# Altium PCB Voron_Chassis_Circuit_PCB.PcbDoc
Units mil, origin at the board's own origin, x right, y up, seen from the top; angles counter-clockwise.
Board outline 2559.06 x 2204.72 mil, 2 copper layers (Top Layer, Bottom Layer); 8 components, 14 nets, 36 pads, 0 vias.
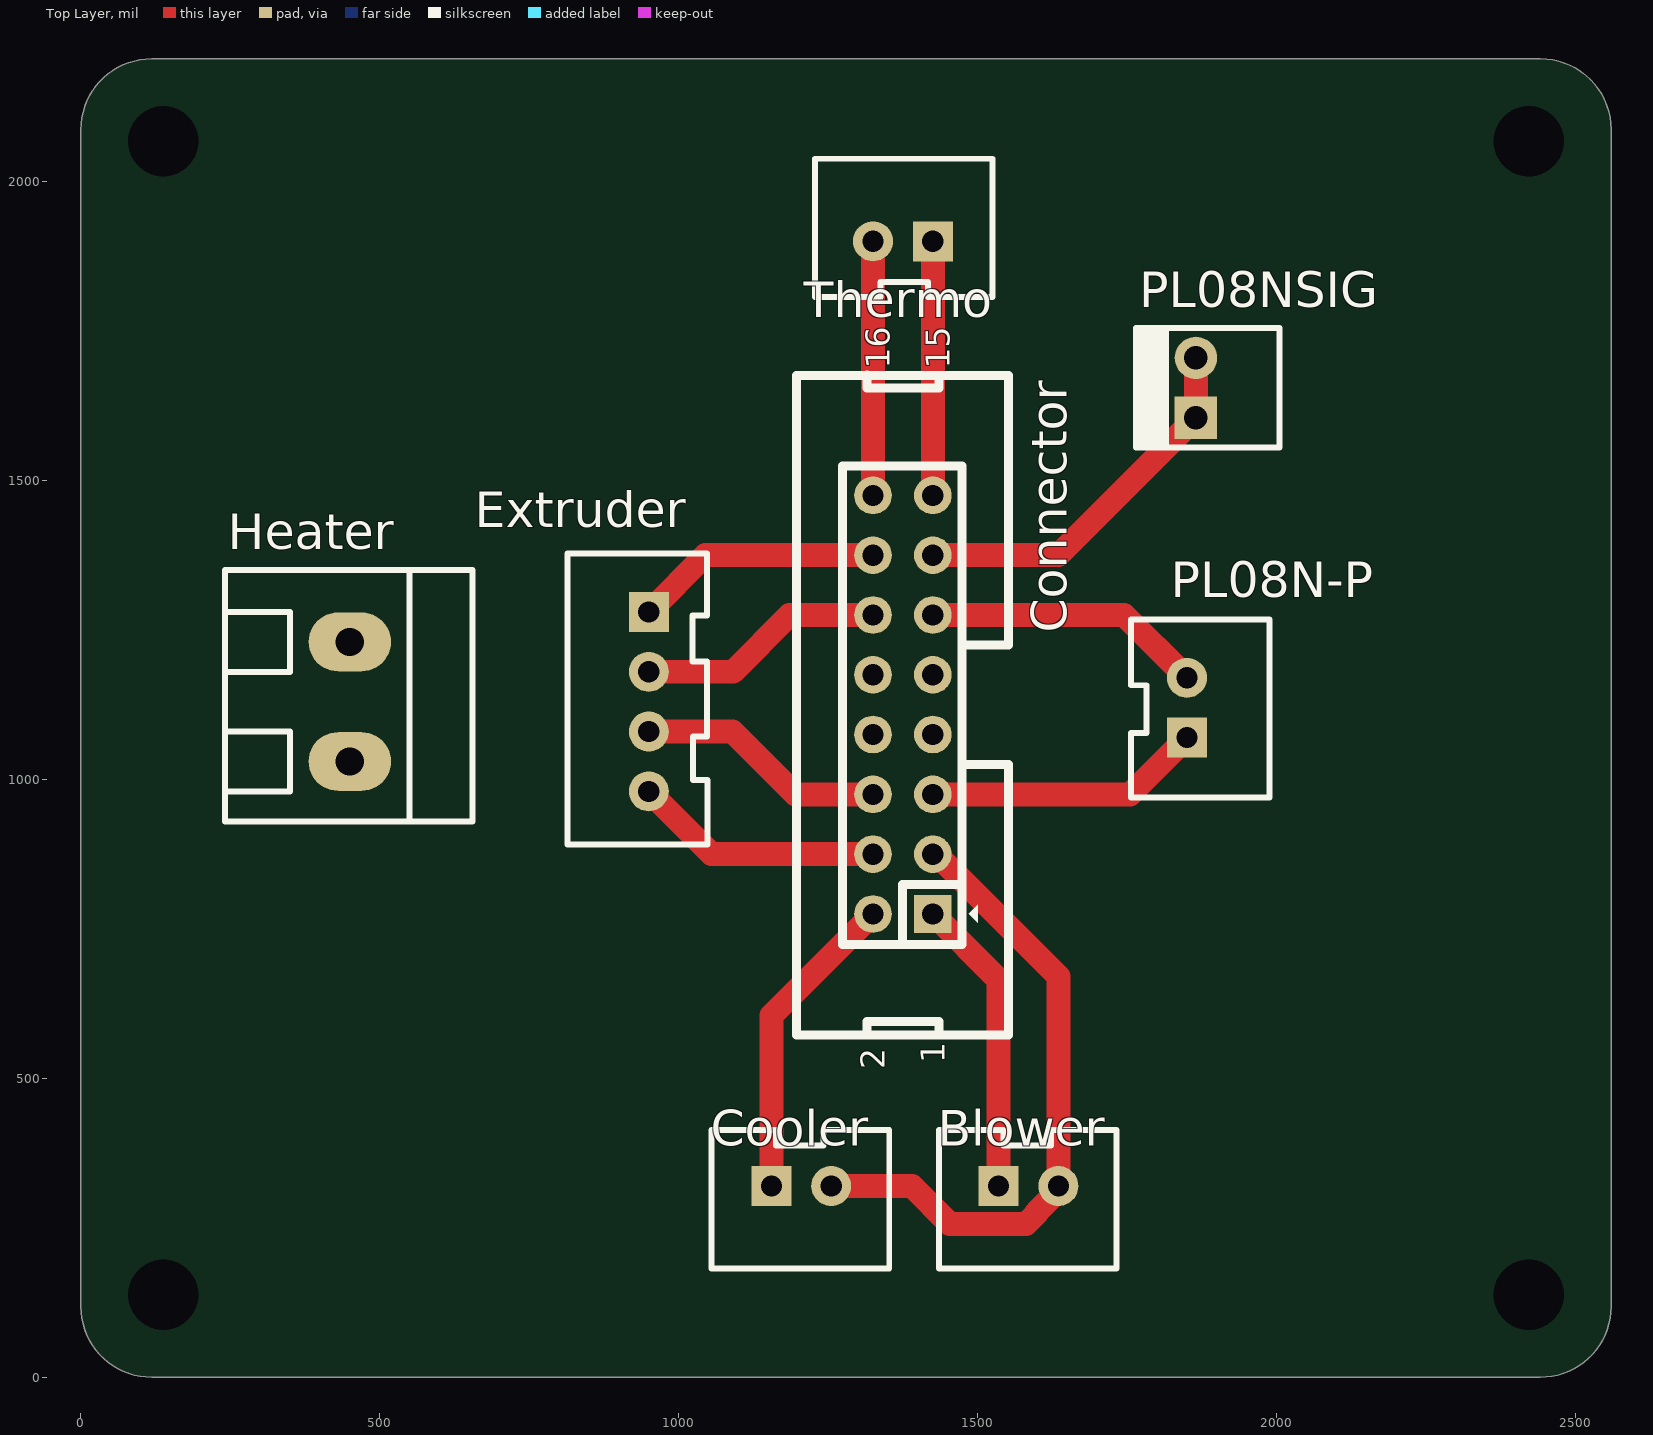
[diagram p0: Top Layer view]
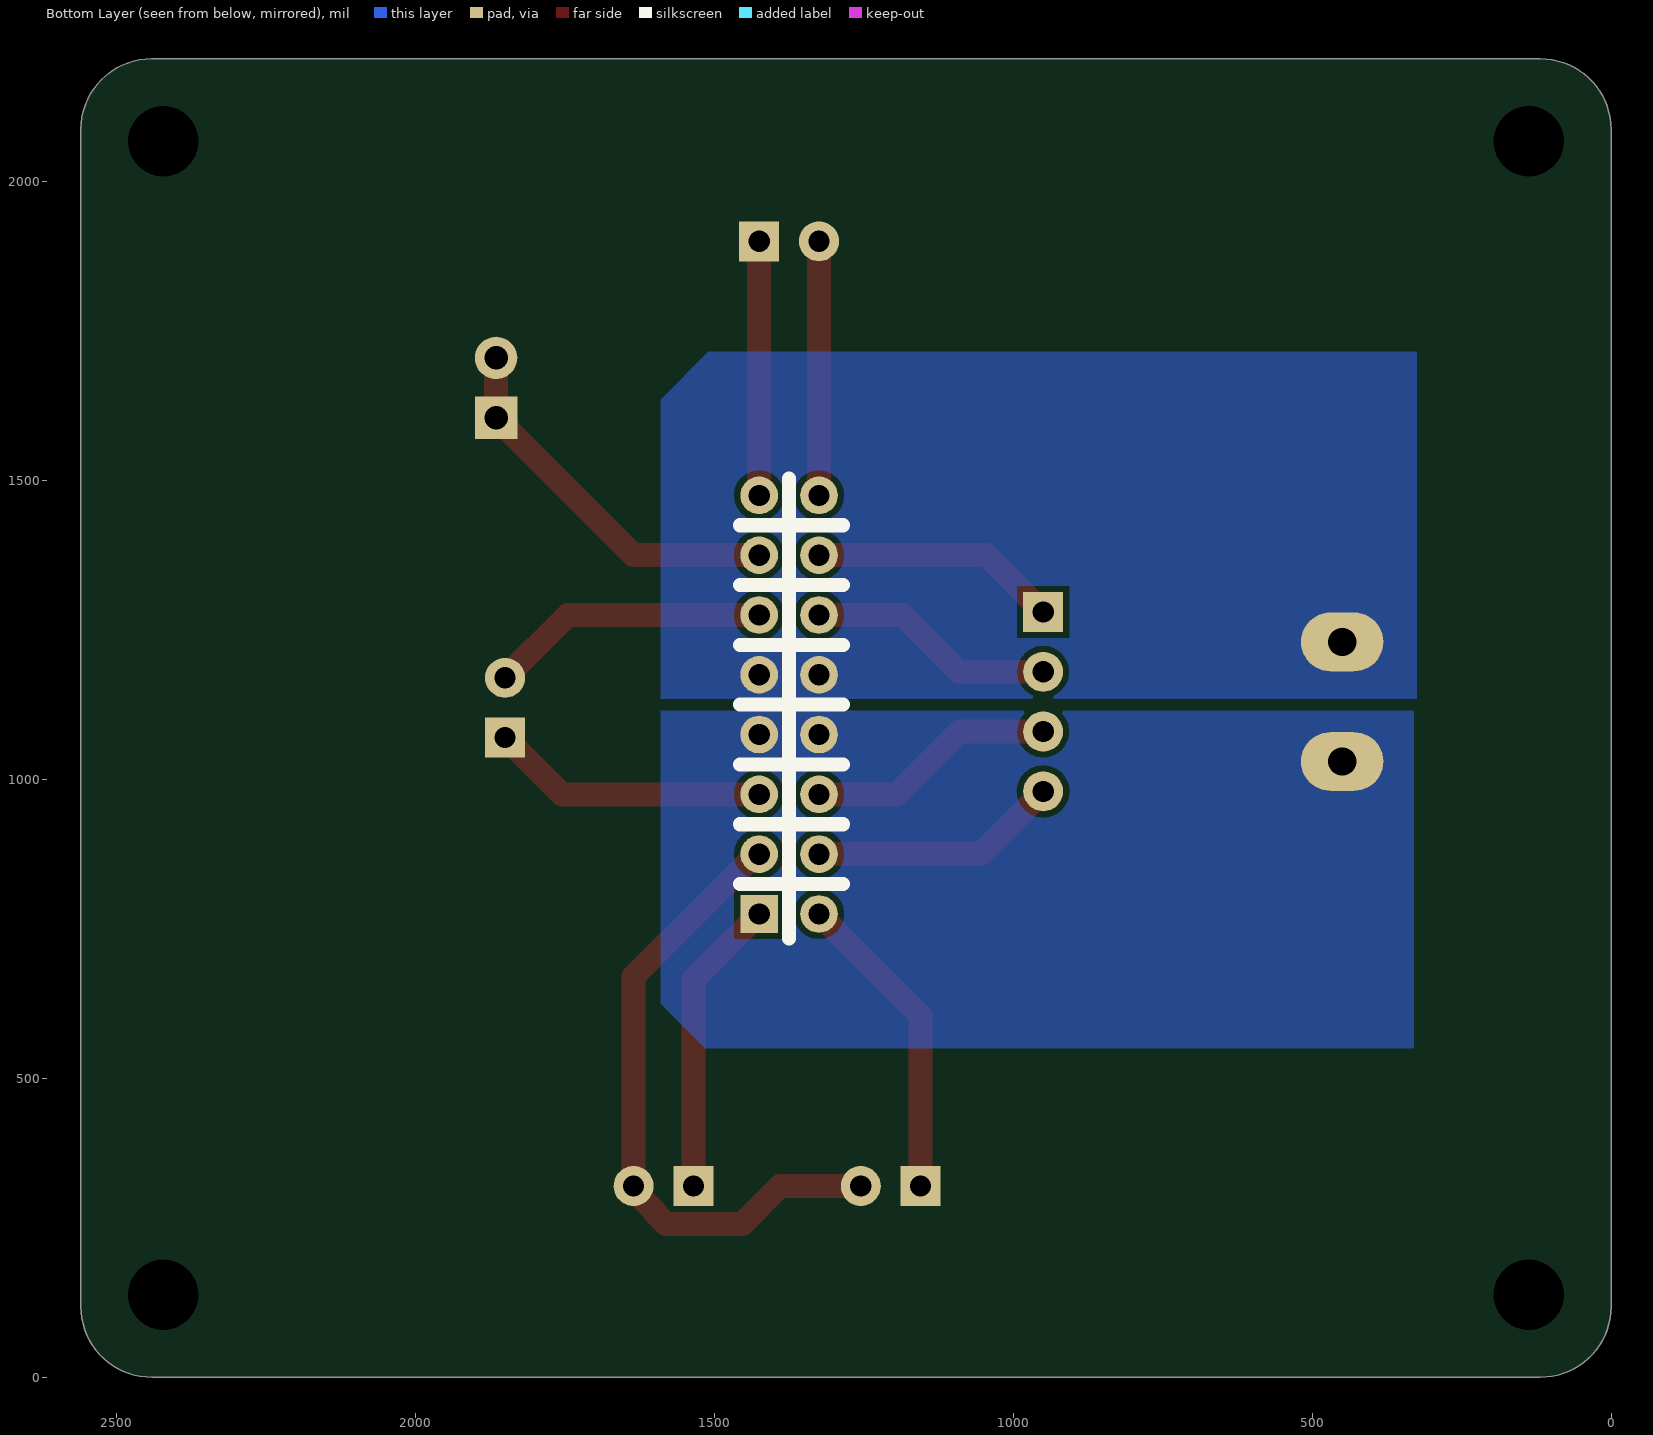
[diagram p1: Bottom Layer view, seen from below]

## Layer stack, top to bottom
Top Solder: solder mask 0.4, Solder Resist, Dk 3.5
Top Layer: signal copper 1.4
Dielectric 1: dielectric 12.6, FR-4, Dk 4.8
Bottom Layer: signal copper 1.4
Bottom Solder: solder mask 0.4, Solder Resist, Dk 3.5

## Board outline
0.25,118.36 ccw(c118.36,118.36) 118.36,0.25 2441.19,0.25 ccw(c2441.19,118.36) 2559.31,118.36 2559.31,2086.86 ccw(c2441.19,2086.86) 2441.19,2204.97 118.36,2204.97 ccw(c118.36,2086.86) 0.25,2086.86

## Design rules (kind name [scope] priority, off if disabled: settings)
Clearance [All] p1: gap=10 ignorepadtopadclearanceinfootprint=FALSE except(0: Arc-Hole Track-Hole SMDPad-Hole THPad-Hole Via-Hole Fill-Hole Poly-Hole Region-Hole Text-Hole)
PolygonConnect [All] p1: connectstyle=Direct reliefconductorwidth=10 reliefentries=4 polygonreliefangle="90 Angle" airgapwidth=10
RoomDefinition Schematic [InComponentClass('Schematic')] p1: confinementstyle=ConfineIn formatcopy=TRUE lockcomponents=FALSE outline 0,0 2610,0 2610,2245 0,2245
RoutingVias [All] p1: holewidth=28 width=50 viastyle="Through Hole" minholewidth=28 minwidth=50 maxholewidth=28 maxwidth=50
SolderMaskExpansion [All] p1: expansion=4 istentingtop=FALSE
Width [All] p1: maxlimit=40 minlimit=10 preferedwidth=20 minimp=50.000000 maximp=50.000000 favimp=50.000000
30 further rules are at their usual default settings.

## Components (designator, comment, footprint, x,y, rotation, side; value= is the part's Value field where it differs from the comment)
Blower "HDR-1X2" XH2.54-LI-2P 1585,320 r0 top
Connector "Header 8X2" IDC2.54-LI-2x8P 1425,775 r90 top
Cooler "HDR-1X2" XH2.54-LI-2P 1205,320 r0 top
Extruder "HDR-1X4" XH2.54-LI-4P 950,1130 r270 top
Heater "HDR-1X2" KF128-5.08-2P 450,1130 r270 top
PL08N-P "HDR-1X2" XH2.54-LI-2P 1850,1120 r90 top
PL08NSIG "HDR-1X2" KF2510-LI-2P 1865,1655 r90 top
Thermo "HDR-1X2" XH2.54-LI-2P 1375,1900 r180 top

## Footprints (in the part's own frame and the unit in brackets; to place one, negate y for a bottom-side part, rotate by r counter-clockwise, add the part's x,y. Pads: shape width x height; smd on the part's side, far side on the other; paste and mask are expansions set on the pad)
IDC2.54-LI-2x8P [mm] "16P简易牛角座 淘宝ID:黄晶宝石   店铺网址:https://shop463601444.taobao.com"
  rect 1.6x1.6 hole 0.9: 1(0,0)
  round 1.6 hole 0.9: 2(0,2.54) 3(2.54,0) 4(2.54,2.54) 5(5.08,0) 6(5.08,2.54) 7(7.62,0) 8(7.62,2.54) 9(10.16,0) 10(10.16,2.54) 11(12.7,0) 12(12.7,2.54) 13(15.24,0) 14(15.24,2.54) 15(17.78,0) 16(17.78,2.54)
  silkscreen extent -5.14,-3.2 22.89,5.8, body extent -5.08,-3.08 22.86,5.77, height 9.17
KF128-5.08-2P [mm] "螺钉式接线端子，脚距5.08mm"
  oval 2.5x3.5 hole 1.2: 1(-2.54,0) 2(2.54,0)
  silkscreen extent -5.59,-5.31 5.08,5.21, body extent -5.58,-5.3 5.08,5.2, height 14.15
KF2510-LI-2P [mm] "接插件/2A"
  rect 1.8x1.8 hole 1: 1(-1.27,0)
  round 1.8 hole 1: 2(1.27,0)
  silkscreen extent -2.59,-3.56 2.54,2.54, body extent -2.54,-3.5 2.54,2.4, height 11.05
XH2.54-LI-2P [mm] "接插件，2P  淘宝ID:黄晶宝石   店铺网址:https://shop463601444.taobao.com"
  rect 1.7x1.7 hole 0.9: 1(-1.27,0)
  round 1.7 hole 0.9: 2(1.27,0)
  silkscreen extent -3.81,-3.51 3.74,2.37, body extent -3.77,-3.3 3.77,2.4, height 7.05
XH2.54-LI-4P [mm] "接插件，4P  淘宝ID:黄晶宝石   店铺网址:https://shop463601444.taobao.com"
  rect 1.7x1.7 hole 0.9: 1(-3.81,0)
  round 1.7 hole 0.9: 2(-1.27,0) 3(1.27,0) 4(3.81,0)
  silkscreen extent -6.3,-3.45 6.07,2.49, body extent -6.31,-3.3 6.31,2.4, height 7.03

## Part data
Blower Cooler Heater PL08N-P PL08NSIG Thermo: library part "Header 2", "2P接插件", BOM名称=2P接插件
  Blower Cooler PL08N-P PL08NSIG Thermo: 版权归属="封装库来自淘宝 ID：黄晶宝石", 联系售后=https://shop463601444.taobao.com
  Heater: 学习资源=https://shop463601444.taobao.com, 版权归属="封装库来自淘宝卖家 ID：黄晶宝石"
Connector: "8*2P接插件", BOM名称=8*2P接插件, 学习资源=https://shop463601444.taobao.com, 版权归属="封装库来自淘宝 ID：黄晶宝石"
Extruder: library part "Header 4", "4P接插件", BOM名称=4P接插件, 学习资源=https://shop463601444.taobao.com, 版权归属="封装库来自淘宝 ID：黄晶宝石"

## Free pads (board coordinates)
  round 106.3 hole 118.11: ""(138.05,138.05) ""(138.05,2067.18) ""(2421.51,138.05) ""(2421.51,2067.18)

## Nets (pads, with @x,y where several pads share a name; then routed paths per layer and width w, separated by ;. In a path a pad name is that pad's centre, name@x,y a point inside that pad or via, vN(x,y) a via of type N, cw(c..) or ccw(c..) an arc to the next point about the centre after c; other vN are vias at no path point)
BlowerHIGH: Blower.1 Connector.1 | length 500.6
  Top Layer w40: Connector.1 1535,665 Blower.1
CoolerHIGH: Connector.2 Cooler.1 | length 525.4
  Top Layer w40: Cooler.1 1155,605 Connector.2
FanGND: Blower.2 Connector.3 Cooler.2 | length 1083.2
  Top Layer w40: Cooler.2 1389.86,320 1453.32,256.54 1580.89,256.54 1598.46,274.11 1598.46,276.18 1635,312.71 Blower.2 1635,670.42 1430.42,875 Connector.3
HeaterH: Connector.9 Connector.10 Heater.1
HeaterL: Connector.7 Connector.8 Heater.2
Motor1: Connector.14 Extruder.1 | length 414.4
  Top Layer w40: Extruder.1 1045,1375 Connector.14
Motor2: Connector.12 Extruder.2 | length 414.4
  Top Layer w40: Extruder.2 1090.53,1180 1185.53,1275 Connector.12
Motor3: Connector.6 Extruder.3 | length 418.5
  Top Layer w40: Extruder.3 1090,1080 1195,975 Connector.6
Motor4: Connector.4 Extruder.4 | length 418.5
  Top Layer w40: Extruder.4 1055,875 Connector.4
PL08NG: Connector.11 PL08N-P.2 | length 468.5
  Top Layer w40: Connector.11 1745,1275 PL08N-P.2
PL08NH: Connector.5 PL08N-P.1 | length 464.4
  Top Layer w40: Connector.5 1755,975 PL08N-P.1
PL08NSIG_OUT: Connector.13 PL08NSIG.1 PL08NSIG.2 | length 635.3
  Top Layer w40: Connector.13 1635,1375 PL08NSIG.1 PL08NSIG.2
THERMOH: Connector.15 Thermo.1 | length 425
  Top Layer w40: Connector.15 Thermo.1
THERMOL: Connector.16 Thermo.2 | length 425
  Top Layer w40: Connector.16 Thermo.2

## Polygon pours and split planes (outlines as drawn)
HeaterL on Bottom Layer "HeaterH" (solid, pour order 1): 1590,1115 330,1115 330,550 1515,550 1590,625
HeaterH on Bottom Layer "HeaterH" (solid, pour order 0): 1590,1135 325,1135 325,1715 1510,1715 1590,1635

## Silkscreen, mask and mechanical layers (free items; w line width, h text height)
Mechanical 1:
  lines w0.5: 0.25,118.36 ccw(c118.36,118.36) 118.36,0.25 2441.19,0.25 ccw(c2441.19,118.36) 2559.31,118.36 2559.31,2086.86 ccw(c2441.19,2086.86) 2441.19,2204.97 118.36,2204.97 ccw(c118.36,2086.86) 0.25,2086.86 0.25,118.36

## Text inside footprints (layer, text, board x,y; h text height)
Connector: Top Overlay "15" at 1453,1687 h40 r90; Top Overlay "16" at 1353,1687 h40 r90; Top Overlay "1" at 1445,525 h40 r90; Top Overlay "2" at 1345,515 h40 r90